# Altium PCB MergeBoard4.PcbDoc
Units mil, origin at the board's own origin, x right, y up, seen from the top; angles counter-clockwise.
Board outline 3165.42 x 3261.12 mil, 4 copper layers (Top Layer, Internal Plane 1, Internal Plane 2, Bottom Layer); 115 components, 67 nets, 383 pads, 110 vias.
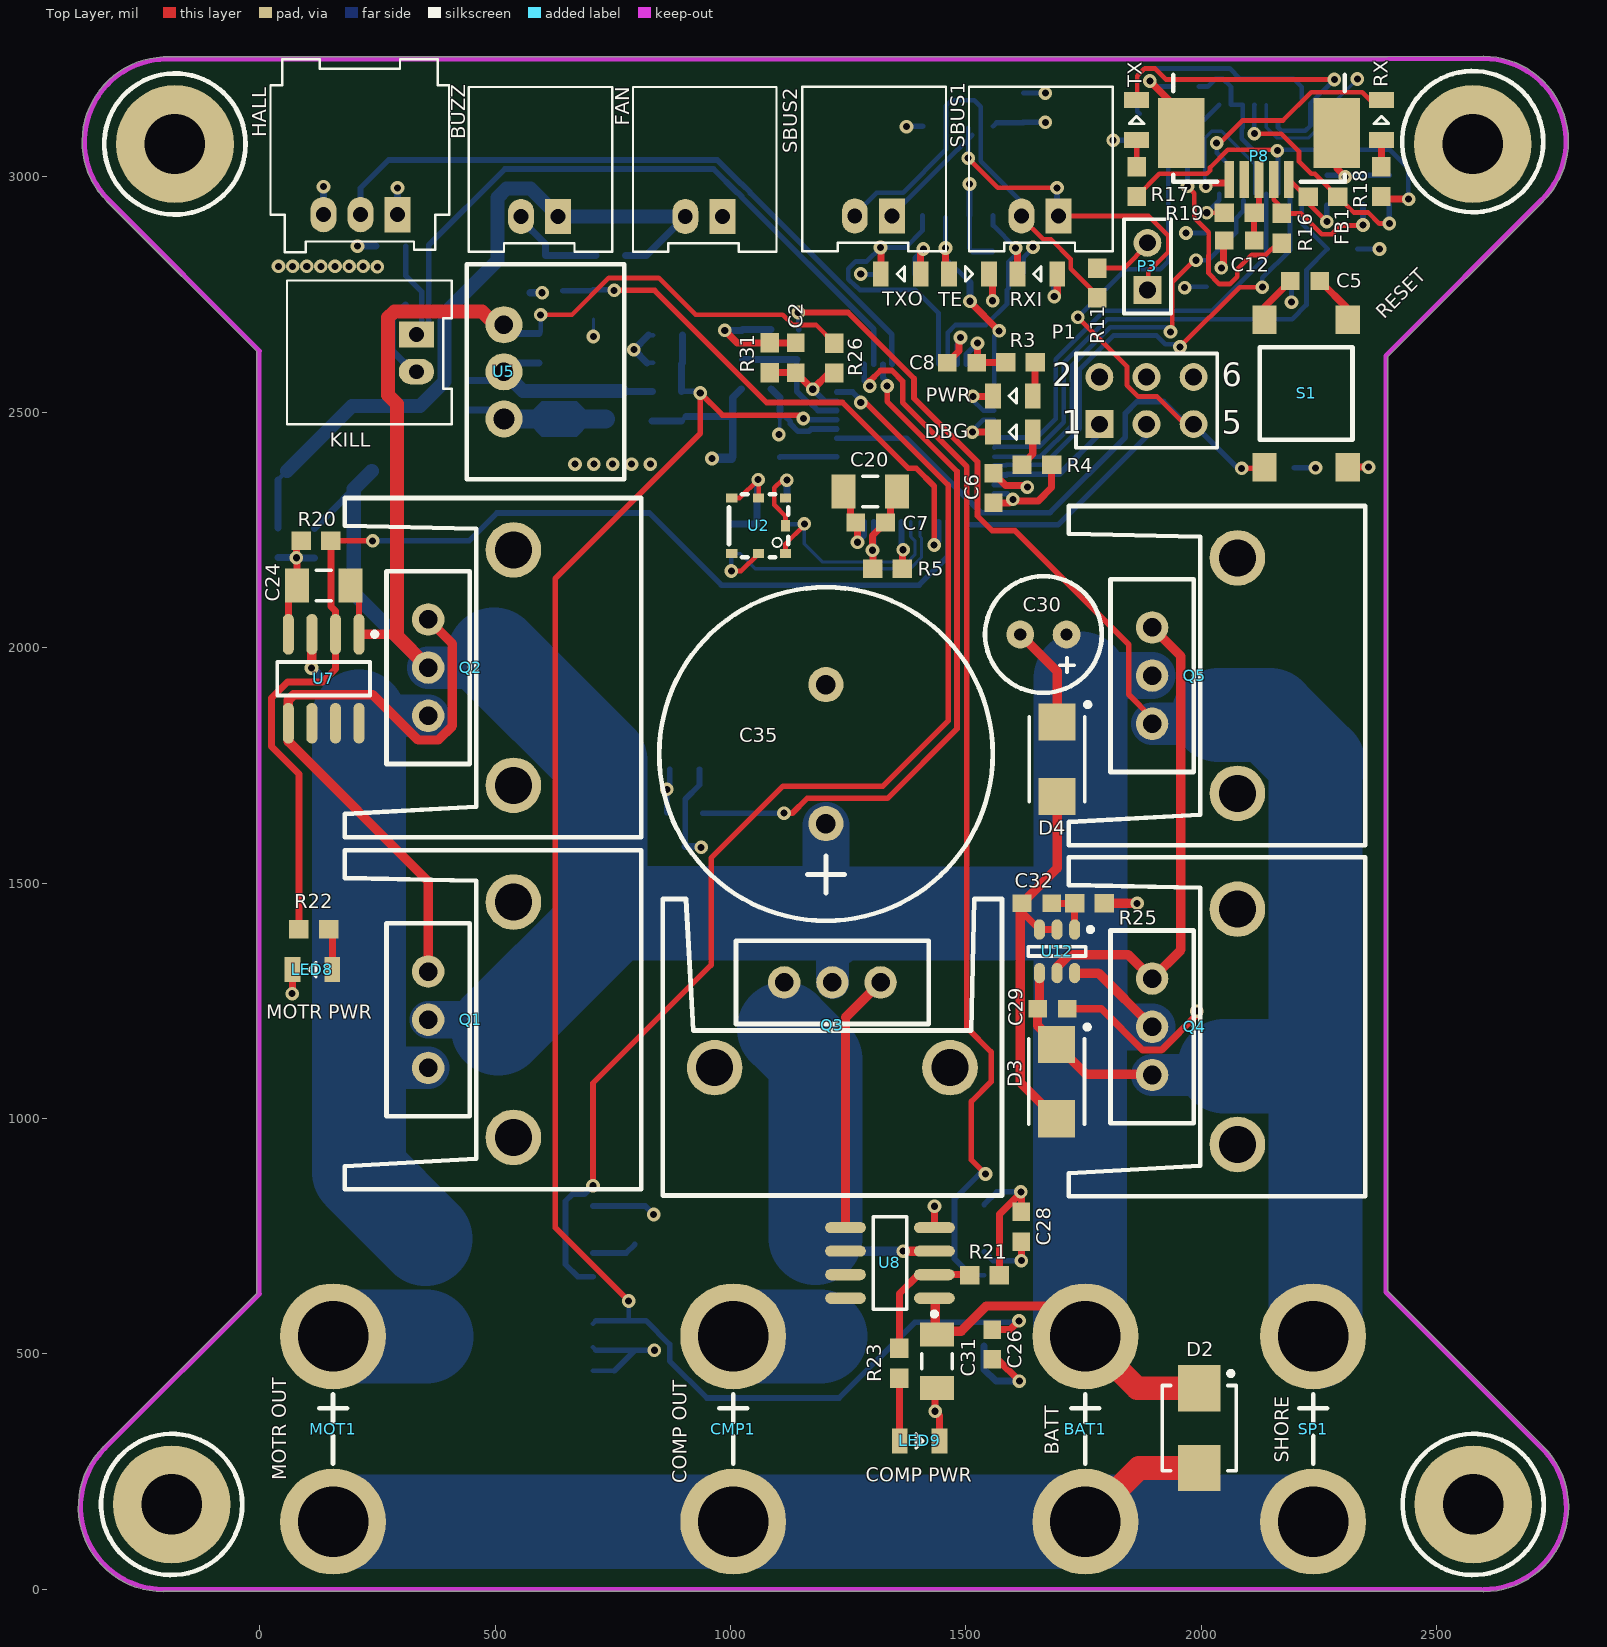
[diagram p0: Top Layer view]
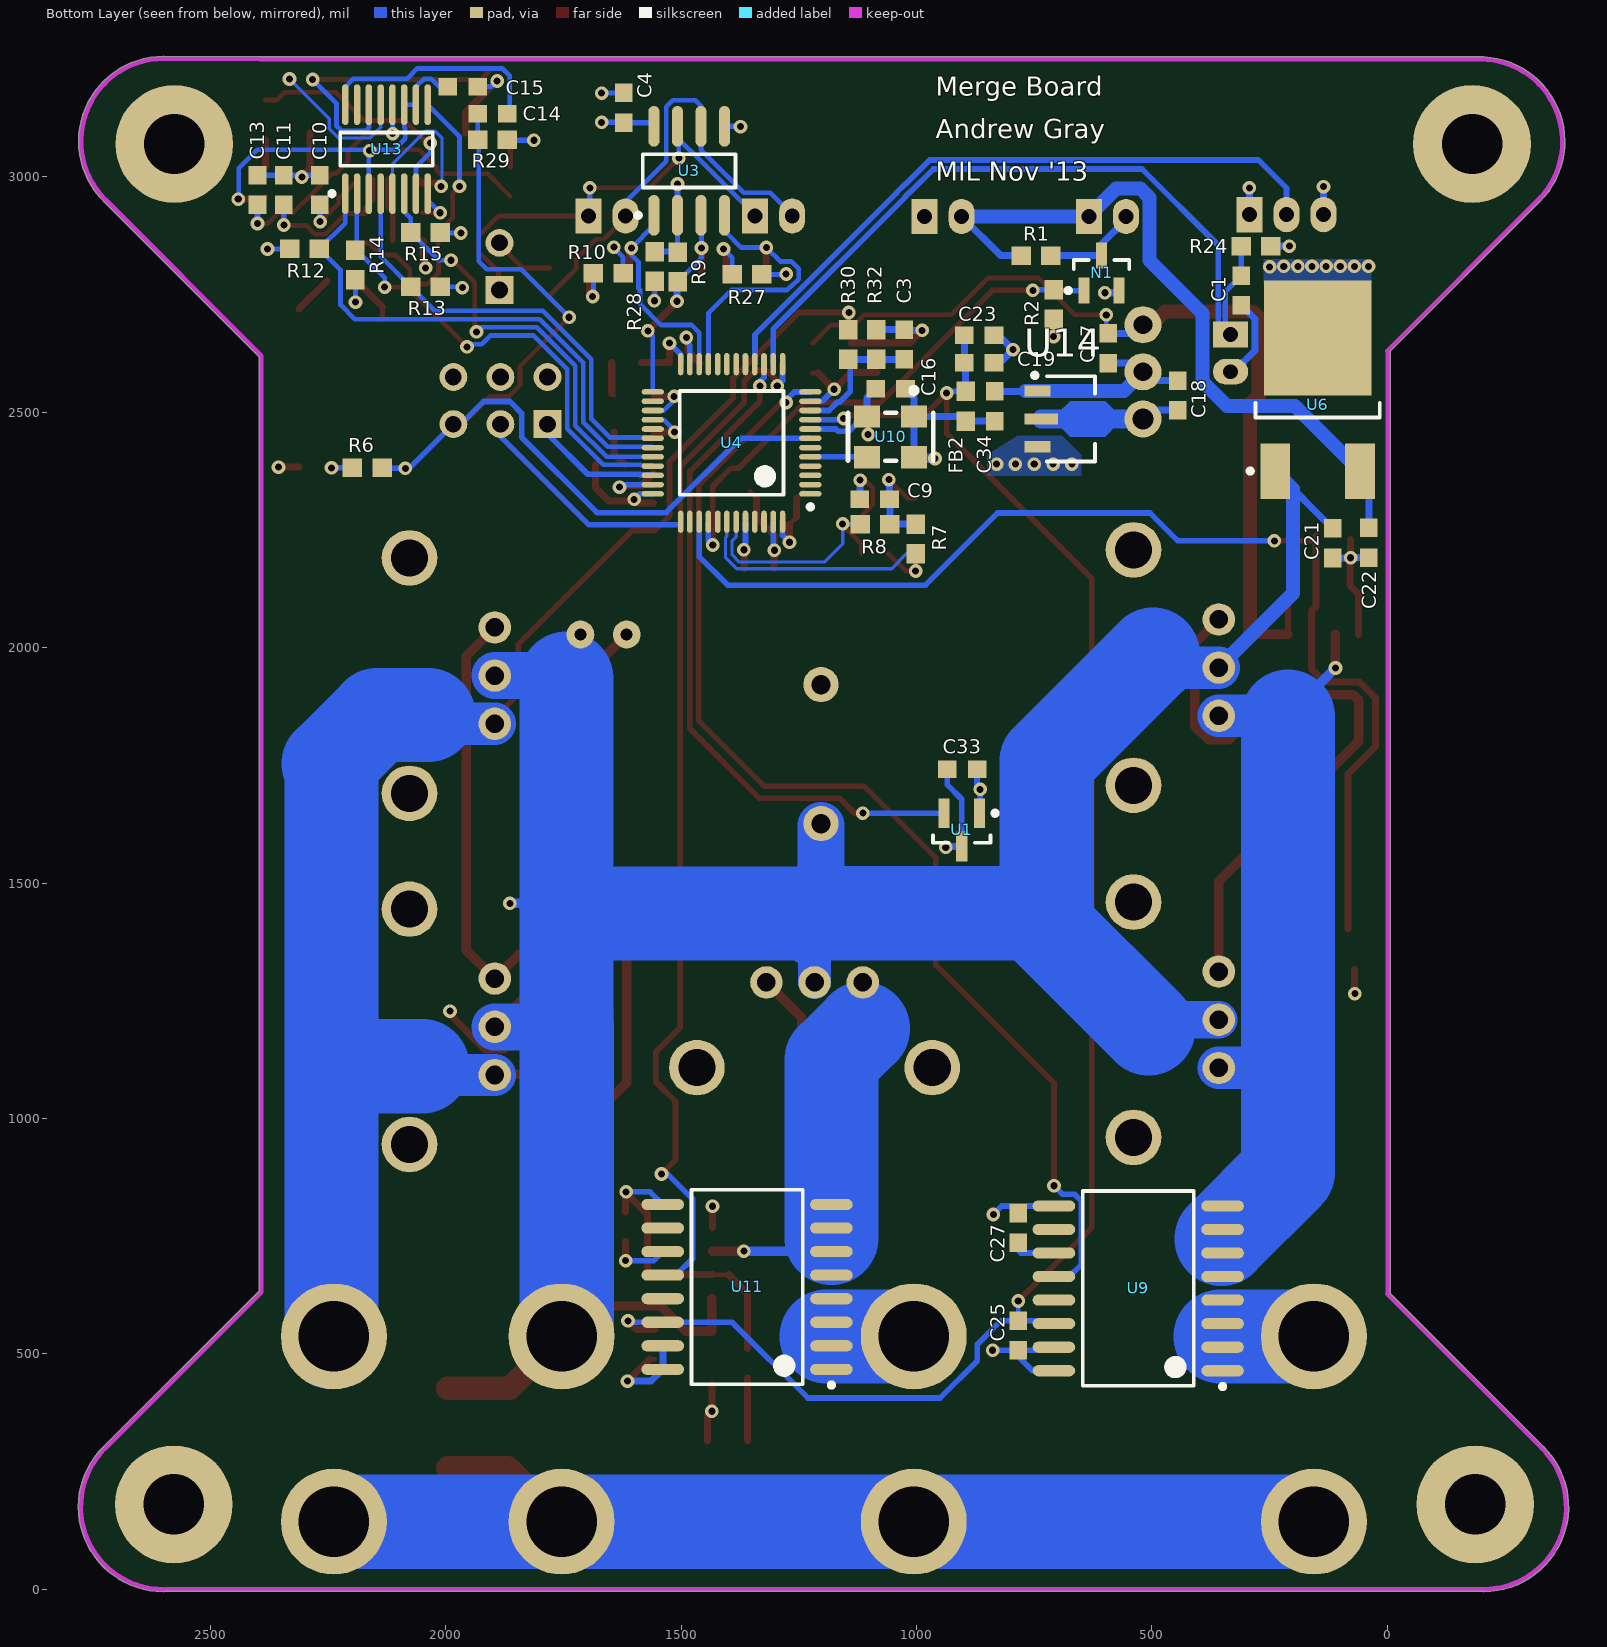
[diagram p1: Bottom Layer view, seen from below]
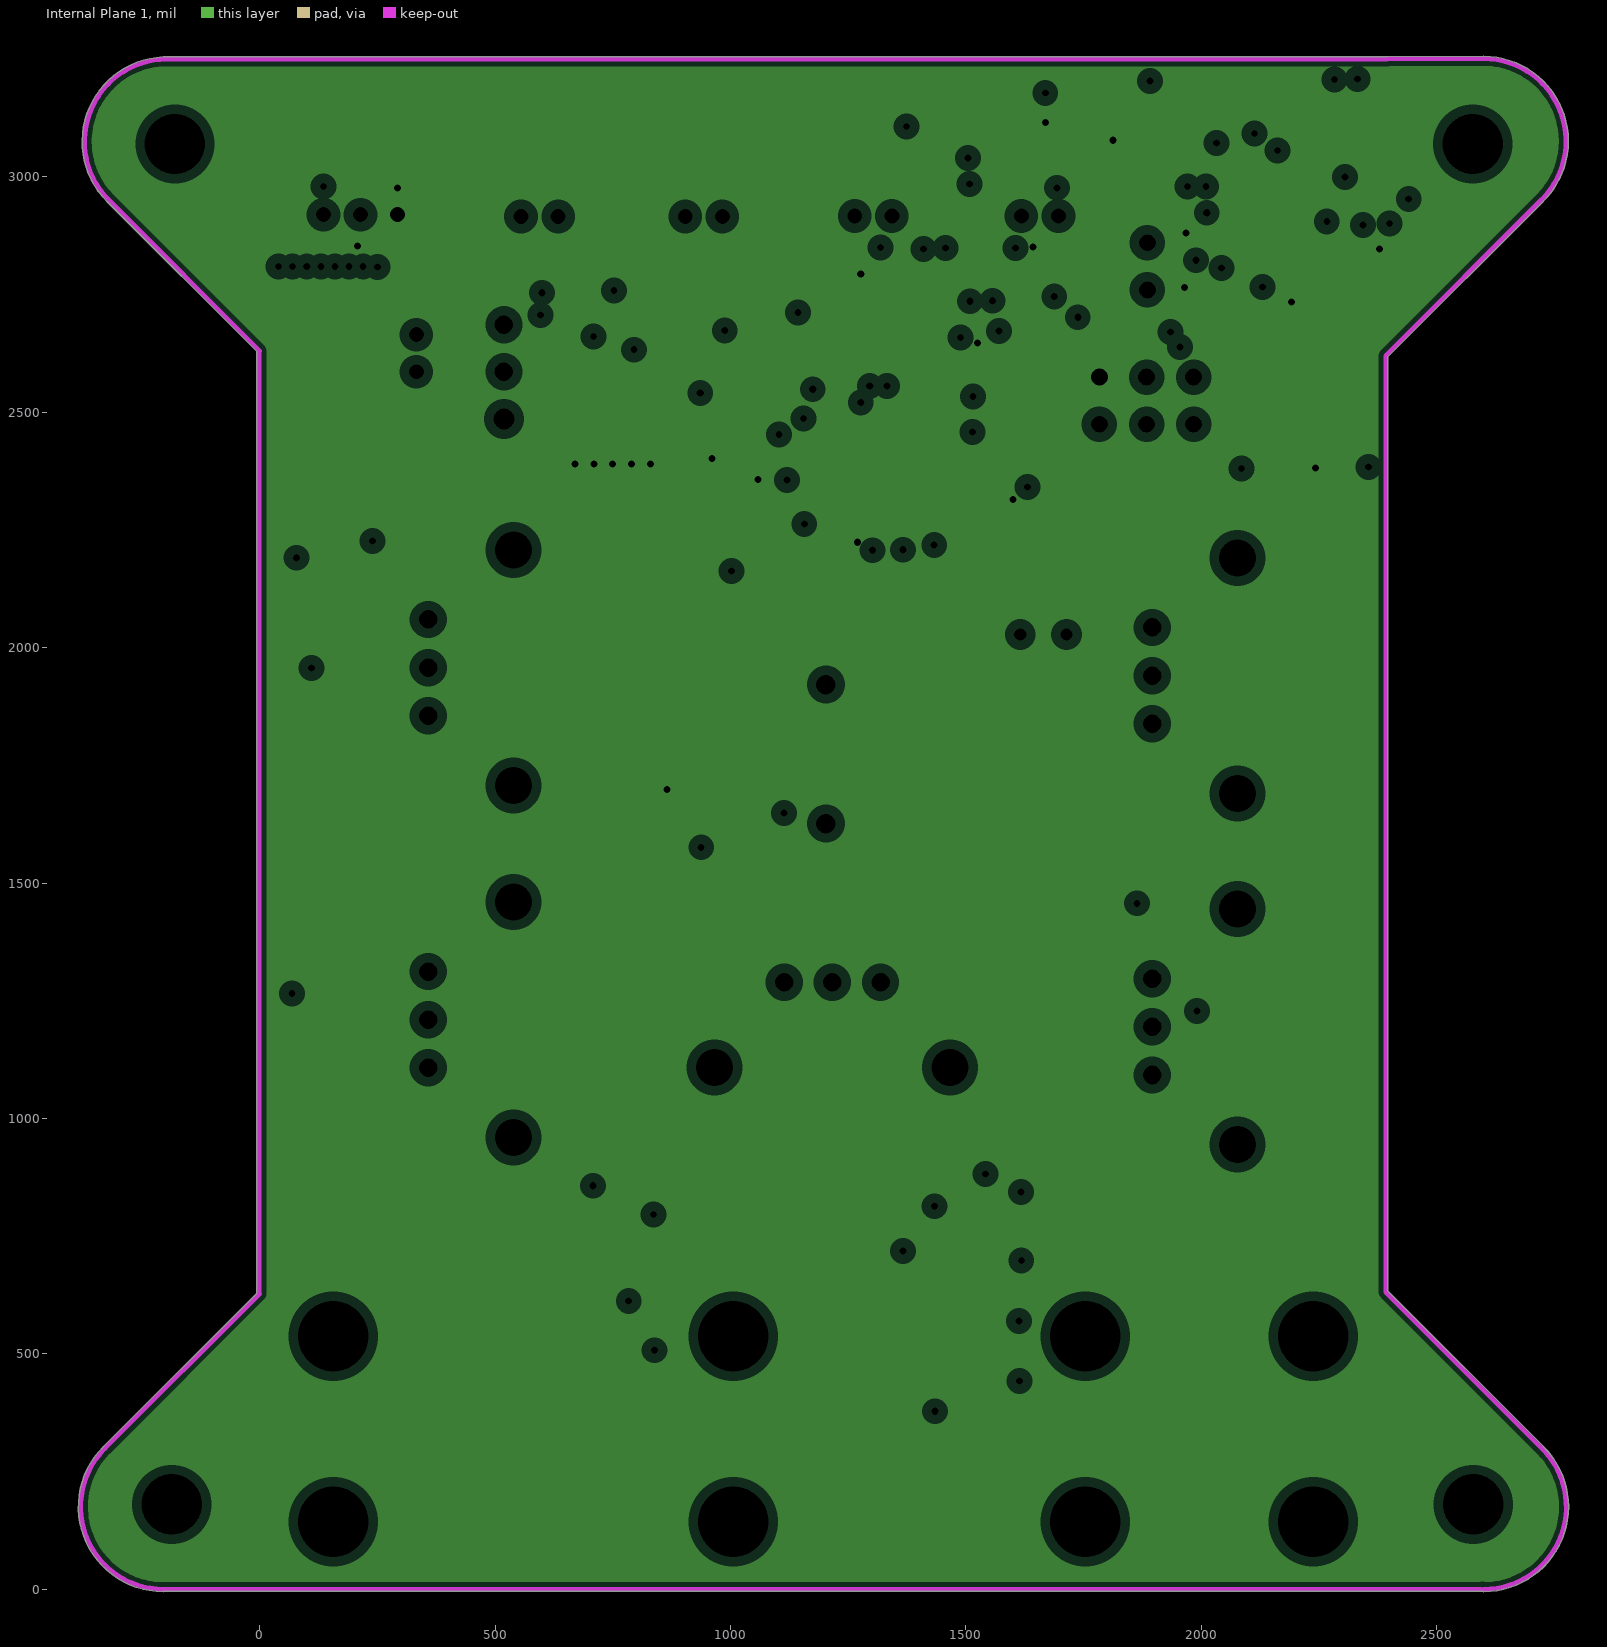
[diagram p2: Internal Plane 1, clearances drawn from the general rule]
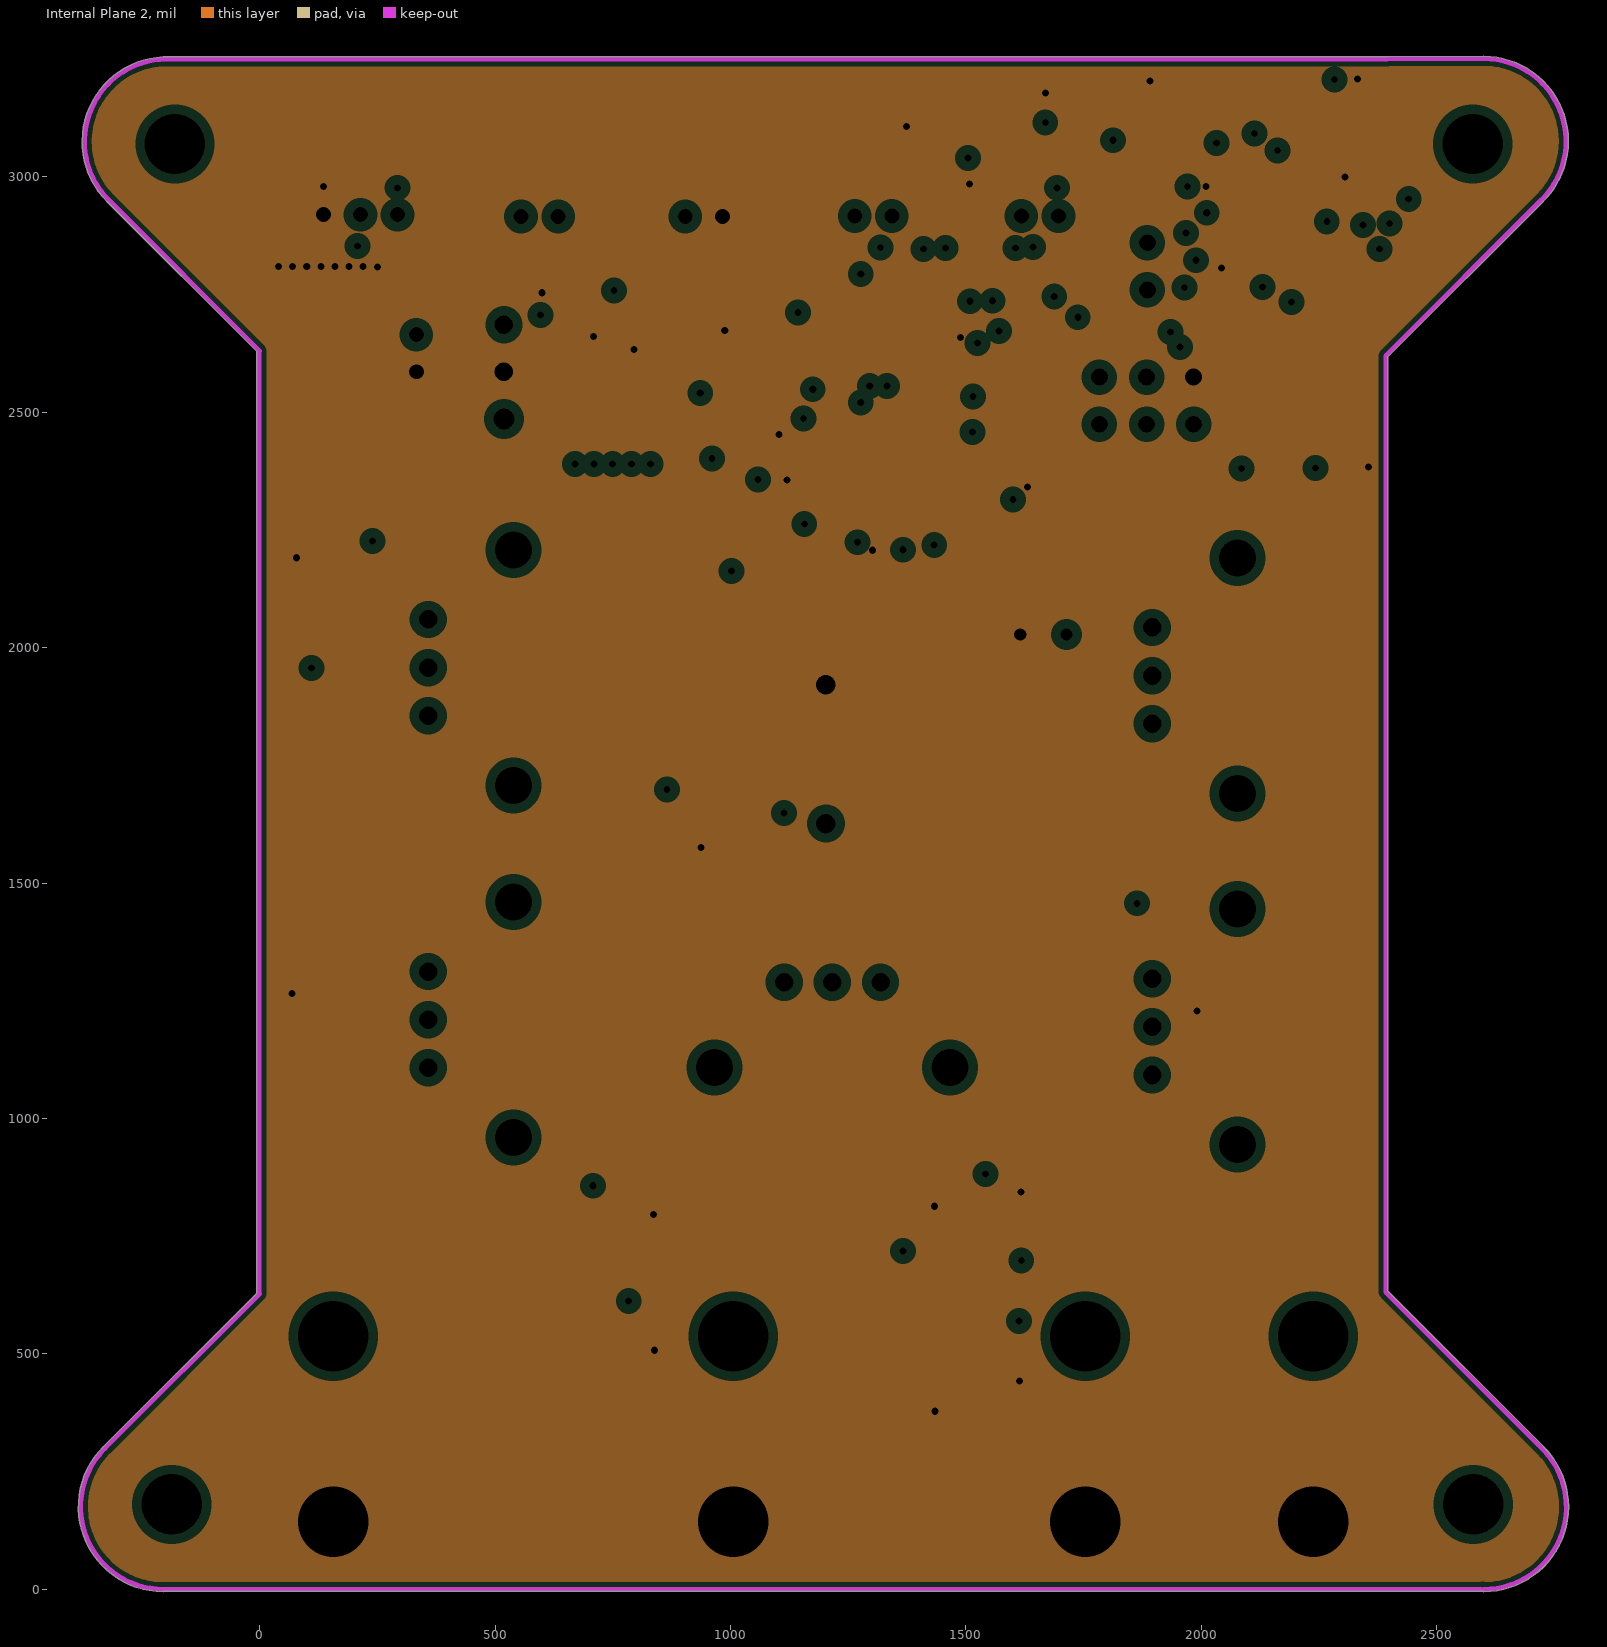
[diagram p3: Internal Plane 2, clearances drawn from the general rule]

## Layer stack, top to bottom
Top Layer: signal copper 1.4
Dielectric: core 12.6, FR-4, Dk 4.8
Internal Plane 1: plane copper 1.4, net 3V3
Dielectric: prepreg 12.6, FR-4, Dk 4.8
Internal Plane 2: plane copper 1.4, net GND
Dielectric: core 12.6, FR-4, Dk 4.8
Bottom Layer: signal copper 1.4

## Board outline
-205,-5.01 ccw(c-205,0) -204.11,-4.94 2595,-4.94 ccw(c2595,0) 2597.59,-4.2 ccw(c2600.46,-0.09) 2600.46,-5.1 ccw(c2600.46,174.91) 2780.47,174.91 ccw(c2600.46,174.91) 2727.75,302.2 ccw(c2724.2,298.66) 2727.07,302.78 2396.87,632.97 2396.87,2618.43 ccw(c2393.74,2622.26) 2397.23,2618.77 2726.61,2948.14 ccw(c2723.74,2952.26) 2727.29,2948.71 ccw(c2600,3076) 2780.01,3076 ccw(c2600,3076) 2600,3256.02 ccw(c2600,3251) 2599.09,3255.93 2395,3254.94 2394.98,3254.94 2395,3254.94 -196.11,3254.94 ccw(c-197,3250) -197,3255.02 ccw(c-197,3075) -202.33,3254.94 -204,3254.94 ccw(c-204,3250) -204.98,3254.84 ccw(c-197,3075) -324.29,2947.71 ccw(c-320.74,2951.26) -323.61,2947.14 -5.92,2629.45 ccw(c-1,2629) -5.94,2629 -5.94,628.53 -331.61,302.86 ccw(c-328.74,298.74) -332.29,302.29 ccw(c-205,175)

## Design rules (kind name [scope] priority, off if disabled: settings)
Clearance [All] p1: gap=7
Height [All] p1: minheight=0 maxheight=1500 prefheight=500
HoleSize [All] p1: absolutevalues=TRUE maxlimit=150 minlimit=15 maxpercent=80.000 minpercent=20.000
PlaneClearance [All] p1: clearance=20
PlaneConnect [All] p1: planeconnectstyle=Direct reliefexpansion=20 reliefentries=4 reliefconductorwidth=10 reliefairgap=10
PolygonConnect [All] p1: connectstyle=Direct reliefconductorwidth=10 reliefentries=4 polygonreliefangle="90 Angle" airgapwidth=10
RoutingVias [All] p1: holewidth=15 width=29 viastyle="Through Hole" minholewidth=15 minwidth=29 maxholewidth=40 maxwidth=100
SilkToSolderMaskClearance SilkscreenOverComponentPads [IsPad] p1: minsilkscreentomaskgap=10 clearancetoexposedcopper=TRUE
SolderMaskExpansion SolderMaskExpansion_1 [All] p1: expansion=4
SolderMaskExpansion "Negative Mask" [All] p2: expansion=-20
Width [All] p1: maxlimit=200 minlimit=7 preferedwidth=10
23 further rules are at their usual default settings.

## Classes and differential pairs
component class Attachments: BUZZ C1 C2 C3 C33 FAN HALL KILL N1 R1 R2 R24 R26 R30 R31 R32 SHPW U1
component class CPU: C4 C5 C6 C7 C8 C9 C10 C11 C12 C13 C14 C15 C16 C20 DBG FB1 P1 P3 P8 PWR R3 R4 R5 R6 R7 R8 R9 R10 R11 R12 R13 R14 R15 R16 R17 R18 R19 R27 R28 R29 RX RXI S1 SBUS1 SBUS2 TE TX TXO U2 U3 U4 U10 U13
component class PowerSplitter: C24 C25 C26 C27 C28 C31 CMP1 LED8 LED9 MOT1 Q1 Q2 Q3 R20 R21 R22 R23 U7 U8 U9 U11
component class Power: C17 C18 C19 C21 C22 C23 C34 FB2 U5 U6 U14
component class "Rail Station": BAT1 C29 C30 C32 C35 D2 D3 D4 Q4 Q5 R25 SP1 U12
net class Blob: MT_PW RAIL+ SHORE+

## Components (designator, comment, footprint, x,y, rotation, side; value= is the part's Value field where it differs from the comment)
BAT1 "BATWIRE" BATWIRE12 1754,537 r270 top
BUZZ "2-pin Horz Sherlock" MOLEX-HDR-1X2-SHERLOCK-HORZ 634,2916 r0 top
C1 "Cap" CAPC0603 310,2759 r270 bottom
C2 "Cap" CAPC0603 1139,2616 r90 top
C3 "Cap" CAPC0603 1026,2644 r90 bottom
C4 "Cap" CAPC0603 1622,3147 r270 bottom
C5 "Cap" CAPC0603 2221,2779 r0 top
C6 "Cap" CAPC0603 1559,2339 r90 top
C7 "Cap" CAPC0603 1298,2266 r0 top
C8 "Cap" CAPC0603 1492,2605 r180 top
C9 "Cap" CAPC0603 1089,2315 r0 bottom
C10 "Cap" CAPC0603 2268,2972 r90 bottom
C11 "Cap" CAPC0603 2344,2972 r90 bottom
C12 "Cap" CAPC0603 2081,2865 r180 top
C13 "Cap" CAPC0603 2400,2972 r90 bottom
C14 "Cap" CAPC0603 1901,3134 r0 bottom
C15 "Cap" CAPC0603 1964,3192 r180 bottom
C16 "Cap" CAPC0603 1055,2550 r0 bottom
C17 "Cap" CAPC0603 593,2636 r270 bottom
C18 "Cap" CAPC0603 445,2536 r90 bottom
C19 "Cap" CAPC0603 867,2605 r180 bottom
C20 "Cap" CAPC1206 1297,2332 r180 top
C21 "Cap" CAPC0603 116,2222 r270 bottom
C22 "Cap" CAPC0603 39,2223 r270 bottom
C23 "Cap" CAPC0603 867,2664 r180 bottom
C24 "Cap" CAPC1206 136,2132 r0 top
C25 "Cap" CAPC0603 784,539 r270 bottom
C26 "Cap" CAPC0603 1556,520 r270 top
C27 "Cap" CAPC0603 784,767 r90 bottom
C28 "Cap" CAPC0603 1618,770 r90 top
C29 "Cap" CAPC0603 1684,1233 r0 top
C30 "CapPol" CAP22uF100V 1665,2028 r180 top
C31 "Cap" CAPC1206 1439,484 r90 top
C32 "Cap" CAPC0603 1651,1457 r180 top
C33 "Cap" CAPC0603 903,1742 r180 bottom
C34 "Cap" CAPC0603 834,2513 r90 bottom
C35 "CapPol" CAP1000uF 1203,1774 r90 top
CMP1 "BATWIRE" BATWIRE12 1006,537 r270 top
D2 "SMBJ60A-13-F" SMBJ60A-13-F 1996,342 r270 top
D3 "SS16T3G" SS16T3G 1693,1078 r270 top
D4 "SS16T3G" SS16T3G 1694,1763 r270 top
DBG "LED" LED0805 1600,2458 r180 top
FAN "2-pin Horz Sherlock" MOLEX-HDR-1X2-SHERLOCK-HORZ 983,2916 r0 top
FB1 "FBead" RES0603 2259,2958 r180 top
FB2 "FBead" RES0603 896,2513 r270 bottom
HALL "3pos RA sherlock connector" MOLEX-HDR-1X3-SHERLOCK-RA 293,2920 r0 top
KILL "2-pin Horz Sherlock" MOLEX-HDR-1X2-SHERLOCK-HORZ 333,2665 r90 top
LED8 "LED" LED0805 112,1316 r180 top
LED9 "LED" LED0805 1402,315 r0 top
MOT1 "BATWIRE" BATWIRE12 156,537 r270 top
N1 "NMOSFET" 2N7002P,215 607,2796 r90 bottom
P1 "Header 3X2" HDR2X3 1784,2475 r0 top
P3 "Header 2" HDR1X2 1886,2760 r90 top
P8 "UX60SC-MB-5ST" UX60SC-MB-5ST 2123,2995 r180 top
PWR "LED" LED0805 1600,2535 r180 top
Q1 "IRFB3306PbF" "TO-220AB Heatsink Vertical" 358,1312 r270 top
Q2 "IRFB3306PbF" "TO-220AB Heatsink Vertical" 358,2060 r270 top
Q3 "IRFB3306PbF" "TO-220AB Heatsink Vertical" 1319,1289 r180 top
Q4 "IRFB3306PbF" "TO-220AB Heatsink Vertical" 1896,1297 r270 top
Q5 "IRFB3306PbF" "TO-220AB Heatsink Vertical" 1896,2043 r270 top
R1 "Res" RES0603 746,2833 r180 bottom
R2 "Res" RES0603 709,2729 r270 bottom
R3 "Res" RES0603 1616,2606 r0 top
R4 "Res" RES0603 1651,2389 r180 top
R5 "Res" RES0603 1334,2168 r180 top
R6 "Res" RES0603 2167,2382 r180 bottom
R7 "Res" RES0603 1002,2231 r270 bottom
R8 "Res" RES0603 1088,2262 r0 bottom
R9 "Res" RES0603 1507,2809 r90 bottom
R10 "Res" RES0603 1655,2795 r0 bottom
R11 "Res" RES0603 1779,2775 r270 top
R12 "Res" RES0603 2300,2847 r180 bottom
R13 "Res" RES0603 2043,2767 r0 bottom
R14 "Res" RES0603 2192,2813 r90 bottom
R15 "Res" RES0603 2043,2882 r0 bottom
R16 "Res" RES0603 2171,2891 r270 top
R17 "Res" RES0603 1863,2990 r90 top
R18 "Res" RES0603 2383,2990 r90 top
R19 "Res" RES0603 2081,2924 r180 top
R20 "Res" RES0603 120,2227 r180 top
R21 "Res" RES0603 1540,667 r0 top
R22 "Res" RES0603 115,1402 r0 top
R23 "Res" RES0603 1359,480 r270 top
R24 "Res" RES0603 279,2853 r0 bottom
R25 "Res" RES0603 1763,1457 r180 top
R26 "Res" RES0603 1221,2615 r270 top
R27 "Res" RES0603 1360,2793 r0 bottom
R28 "Res" RES0603 1556,2810 r90 bottom
R29 "Res" RES0603 1901,3079 r0 bottom
R30 "Res" RES0603 1145,2644 r270 bottom
R31 "Res" RES0603 1084,2616 r90 top
R32 "Res" RES0603 1086,2644 r90 bottom
RX "LED" LED0805 2383,3121 r90 top
RXI "LED" LED0805 1652,2794 r180 top
S1 "Button" PTS645xxxxSMTR92 2223,2540 r270 top
SBUS1 "2-pin Horz Sherlock" MOLEX-HDR-1X2-SHERLOCK-HORZ 1697,2917 r0 top
SBUS2 "2-pin Horz Sherlock" MOLEX-HDR-1X2-SHERLOCK-HORZ 1343,2917 r0 top
SP1 "BATWIRE" BATWIRE12 2238,537 r270 top
TE "LED" LED0805 1507,2794 r0 top
TX "LED" LED0805 1863,3121 r90 top
TXO "LED" LED0805 1362,2794 r180 top
U1 "MCP9701" MCP970X-E/TT 904,1613 r270 bottom
U2 "BMP180" BMP180 1060,2259 r270 top
U3 "ISL83485" ISL8348xIBZ 1483,3013 r90 bottom
U4 "STM32F103C8T7" STM32F103C8T7 1393,2435 r0 bottom
U5 "R-78C5.0-1.0" R-78C5.0-1.0 519,2686 r270 top
U6 "MC78M12CDTG" MC78M12CDTG 148,2548 r90 bottom
U7 "MIC5011" MIC5011 136,1934 r270 top
U8 "MIC5011" MIC5011 1339,693 r180 top
U9 "ACS710" ACS710 529,639 r0 bottom
U10 "636L3C008M" 636L3C 1055,2448 r0 bottom
U11 "ACS710" ACS710 1360,642 r0 bottom
U12 "LM5050-1" LM5050 1694,1355 r270 top
U13 "FT230XS" FT230XS 2126,3059 r90 bottom
U14 "MCP1703AT" MCP1703AT-xx02EMB 672,2486 r180 bottom

## Footprints (in the part's own frame and the unit in brackets; to place one, negate y for a bottom-side part, rotate by r counter-clockwise, add the part's x,y. Pads: shape width x height; smd on the part's side, far side on the other; paste and mask are expansions set on the pad)
2N7002P,215 [mm] "MOSFET N-CH SGL 60V SOT-23"
  rect 1.4x0.6 smd: 1(-0.95,0.95) 2(-0.95,-0.95) 3(0.95,0)
  silkscreen extent -1.07,-1.5 0.7,1.93, body extent -0.7,-1.5 0.7,1.5, height 1.1
636L3C [mm]
  rect 1.4x1.2 smd: 1(-1.27,-1.1) 2(1.27,-1.1) 3(1.27,1.1) 4(-1.27,1.1)
  silkscreen extent -2.3,-2.65 2.3,1.3, body extent -2.5,-1.6 2.5,1.6, height 2
ACS710 [mm] "SOIC, 16-Leads, Body 10.5x7.6mm (max), Pitch 1.27mm, IPC Medium Density"
  oval 2.3x0.6 smd: 1(-4.55,4.445) 2(-4.55,3.175) 3(-4.55,1.905) 4(-4.55,0.635) 5(-4.55,-0.635) 6(-4.55,-1.905) 7(-4.55,-3.175) 8(-4.55,-4.445) 9(4.55,-4.445) 10(4.55,-3.175) 11(4.55,-1.905) 12(4.55,-0.635) 13(4.55,0.635) 14(4.55,1.905) 15(4.55,3.175) 16(4.55,4.445)
  silkscreen extent -4.67,-5.25 3,5.42, body extent -3.8,-5.25 3.8,5.25, height 2.65
BATWIRE12 [mm] "Two 12AWG wires soldered directly to the board"
  round 5.715 hole 3.81: +(0,0) -(10,0)
  silkscreen extent 3.13,-0.75 6.87,0.75
BMP180 [mm]
  rect 0.5x0.6 smd: 1(-1.5,1.45) 2(-1.5,0) 3(-1.5,-1.45) 4(1.5,-1.45) 5(1.5,0) 6(1.5,1.45)
  rect 0.6x0.5 smd: 7(0,1.45)
  silkscreen extent -1.7,-1.6 1.7,1.6, body extent -1.9,-1.8 1.9,1.8, height 2
CAP22uF100V [mm] "CAP ALUM 22UF 100V 20% RADIAL"
  round 1.5 hole 0.65: 1(-1.25,0) 2(1.25,0)
  silkscreen extent -3.15,-3.15 3.15,3.15, body extent -3.12,-3.14 3.15,3.14, height 11.2
CAP1000uF [mm] "CAP ALUM 1000UF 50V 20% RADIAL"
  round 1.9 hole 1.05: 1(-3.75,0) 2(3.75,0)
  silkscreen extent -9,-9 9,9, body extent -8.93,-8.98 9,8.98, height 20
CAPC0603 [mm] "Chip Capacitor, 2-Leads, Body 1.60x0.80mm, IPC Medium Density"
  rect 1x0.95 smd: 1(-0.8,0) 2(0.8,0)
  body extent -0.88,-0.48 0.87,0.48, height 0.8
CAPC1206 [mm] "Chip Capacitor, 2-Leads, Body 3.20x1.60mm, IPC Medium Density"
  rect 1.3x1.85 smd: 1(-1.45,0) 2(1.45,0)
  silkscreen extent -0.4,-0.82 0.4,0.82, body extent -1.7,-0.9 1.7,0.9, height 1.8
FT230XS [mm] "SOP, 16-Leads, Body 4.90x3.90mm, Pitch 0.64mm, IPC Medium Density"
  oval 2.2x0.35 smd: 1(-2.4,2.222) 2(-2.4,1.588) 3(-2.4,0.953) 4(-2.4,0.318) 5(-2.4,-0.317) 6(-2.4,-0.952) 7(-2.4,-1.587) 8(-2.4,-2.222) 9(2.4,-2.222) 10(2.4,-1.588) 11(2.4,-0.953) 12(2.4,-0.318) 13(2.4,0.317) 14(2.4,0.952) 15(2.4,1.587) 16(2.4,2.222)
  silkscreen extent -2.52,-2.5 0.9,3.07, body extent -2,-2.5 2,2.5, height 1.76
HDR1X2 [mm] "Connector; Header; 2 Position"
  rect 1.5x1.5 hole 0.9: 1(0,0)
  round 1.5 hole 0.9: 2(2.54,0)
  silkscreen extent -1.27,-1.27 3.81,1.27
HDR2X3 [mm] "Connector; Header; 3x2 Position"
  rect 1.5x1.5 hole 0.9: 1(0,0)
  round 1.5 hole 0.9: 2(0,2.54) 3(2.54,0) 4(2.54,2.54) 5(5.08,0) 6(5.08,2.54)
  silkscreen extent -1.27,-1.27 6.35,3.81
ISL8348xIBZ [mm] "SOIC, 8-Leads, Body 4.90x3.90mm, Pitch 1.27mm, IPC Medium Density"
  oval 2.2x0.6 smd: 1(-2.4,1.905) 2(-2.4,0.635) 3(-2.4,-0.635) 4(-2.4,-1.905) 5(2.4,-1.905) 6(2.4,-0.635) 7(2.4,0.635) 8(2.4,1.905)
  silkscreen extent -2.52,-2.5 0.9,2.88, body extent -2,-2.5 2,2.5, height 1.75
LED0805 [mm] "Chip LED, 2-Leads, Body 2.00x1.25mm, IPC Medium Density"
  rect 0.85x1.35 smd: A(-1.075,0) C(1.075,0)
  silkscreen extent -0.2,-0.4 0.2,0.4, body extent -1,-0.63 1,0.63, height 0.75
LM5050 [mm] "SOT23, 6-Leads, Body 2.90x2.80mm, Pitch 0.95mm, IPC Medium Density"
  oval 1.1x0.6 smd: 1(-1.175,0.95) 2(-1.175,0) 3(-1.175,-0.95) 4(1.175,-0.95) 5(1.175,0) 6(1.175,0.95)
  silkscreen extent -1.3,-1.55 0.25,1.93, body extent -0.87,-1.52 0.88,1.53, height 1.1
MC78M12CDTG [mm] "IC REG LDO 12V 0.5A DPAK"
  rect 3x1.6 smd: 1(-4.39,2.29) 3(-4.39,-2.29)
  rect 6.2x5.8 smd: 2(2.79,0)
  silkscreen extent -4.51,-3.35 -0.71,3.77, body extent -1.5,-3.37 4.72,3.37, height 2.38
MCP970X-E/TT [mm] "SOT23, 3-Leads, Body 2.86x2.37mm, Pitch 0.95mm, IPC Medium Density"
  rect 1.6x0.6 smd: 1(-0.9,0.95) 2(-0.9,-0.95) 3(0.9,0)
  silkscreen extent -1.02,-1.55 0.7,1.92, body extent -0.7,-1.52 0.7,1.53, height 1.12
MCP1703AT-xx02EMB [mm] "SOT89, 3-Leads, Body 4.49x2.45mm, Pitch 1.50mm, Lead Span 4.1mm, IPC Medium Density"
  rect 1.4x0.6 smd: 1(-1.8,1.5) 3(-1.8,-1.5)
  rect 1.8x0.6 smd: 2(-1.6,0)
  Top Layer region: -0.7,0.3 -0.05,0.95 1.85,0.95 2.5,0.3 2.5,-0.3 1.85,-0.95 -0.05,-0.95 -0.7,-0.3
  silkscreen extent -2.08,-2.3 1.3,2.47, body extent -1.3,-2.3 1.3,2.3, height 1.6
MIC5011 [mm] "SOIC, 8-Leads, Body 4.90x3.90mm, Pitch 1.27mm, IPC Medium Density"
  oval 2.2x0.6 smd: 1(-2.4,1.905) 2(-2.4,0.635) 3(-2.4,-0.635) 4(-2.4,-1.905) 5(2.4,-1.905) 6(2.4,-0.635) 7(2.4,0.635) 8(2.4,1.905)
  silkscreen extent -2.52,-2.5 0.9,2.88, body extent -2,-2.5 2,2.5, height 1.63
MOLEX-HDR-1X2-SHERLOCK-HORZ [mm]
  rect 1.397x1.905 hole 0.8: 1(0,0)
  oval 1.397x1.905 hole 0.8: 2(-2,0)
  silkscreen extent -4.83,-1.91 2.92,6.98, body extent -4.83,-1.91 2.87,8.59, height 5.54
MOLEX-HDR-1X3-SHERLOCK-RA [mm]
  rect 1.397x1.905 hole 0.8: 1(0,0)
  oval 1.397x1.905 hole 0.8: 2(-2,0) 3(-4,0)
  silkscreen extent -6.86,-2.03 2.79,8.38, body extent -6.88,-1.99 2.82,8.51, height 5.75
PTS645xxxxSMTR92 [mm] "PTS645 Series SMT 6 mm Tactile Switch"
  rect 1.555x1.3 smd: A(-3.975,2.25) A(3.975,2.25) B(-3.975,-2.25) B(3.975,-2.25)
  silkscreen extent -2.5,-2.5 2.5,2.5, body extent -3,-3 3,3, height 4.5
R-78C5.0-1.0 [mm] "CONV DC/DC 1A 5V OUT SIP VERT"
  round 2 hole 1: 1(0,0) 2(2.54,0)
  round 2 hole 1.15: 3(5.08,0)
  silkscreen extent -3.26,-2 8.34,6.5, body extent -3.2,-1.9 8.3,6.5, height 10.8
RES0603 [mm] "Chip Resistor, 2-Leads, Body 1.60x0.80mm, IPC Medium Density"
  rect 1.05x1 smd: 1(-0.8,0) 2(0.8,0)
  body extent -0.88,-0.48 0.87,0.47, height 0.8
SMBJ60A-13-F [mm] "TVS UNIDIRECT 600W 60V SMB"
  rect 2.5x2.3 smd: A(2.15,0) C(-2.15,0)
  silkscreen extent -3.07,-2 2.3,2, body extent -2.29,-1.97 2.28,1.97, height 2.62
SS16T3G [mm] "DIODE SCHOTTKY 60V 1A SMA"
  rect 2x2 smd: A(2,0) C(-2,0)
  silkscreen extent -3.07,-1.5 2.3,1.78, body extent -2.29,-1.46 2.28,1.46, height 2.2
STM32F103C8T7 [mm] "MCU ARM 32BIT 64K FLASH 48-LQFP"
  oval 1.2x0.3 smd mask+0.07: 1(-4.25,2.75) 2(-4.25,2.25) 3(-4.25,1.75) 4(-4.25,1.25) 5(-4.25,0.75) 6(-4.25,0.25) 7(-4.25,-0.25) 8(-4.25,-0.75) 9(-4.25,-1.25) 10(-4.25,-1.75) 11(-4.25,-2.25) 12(-4.25,-2.75) 25(4.25,-2.75) 26(4.25,-2.25) 27(4.25,-1.75) 28(4.25,-1.25) 29(4.25,-0.75) 30(4.25,-0.25) 31(4.25,0.25) 32(4.25,0.75) 33(4.25,1.25) 34(4.25,1.75) 35(4.25,2.25) 36(4.25,2.75)
  oval 0.3x1.2 smd mask+0.07: 13(-2.75,-4.25) 14(-2.25,-4.25) 15(-1.75,-4.25) 16(-1.25,-4.25) 17(-0.75,-4.25) 18(-0.25,-4.25) 19(0.25,-4.25) 20(0.75,-4.25) 21(1.25,-4.25) 22(1.75,-4.25) 23(2.25,-4.25) 24(2.75,-4.25) 37(2.75,4.25) 38(2.25,4.25) 39(1.75,4.25) 40(1.25,4.25) 41(0.75,4.25) 42(0.25,4.25) 43(-0.25,4.25) 44(-0.75,4.25) 45(-1.25,4.25) 46(-1.75,4.25) 47(-2.25,4.25) 48(-2.75,4.25)
  silkscreen extent -4.37,-2.8 2.8,3.57, body extent -3.5,-3.5 3.5,3.5, height 1.6
"TO-220AB Heatsink Vertical" [mm] "Vertical Heatsink for better heat management"
  round 3 hole 2: 0(-3.75,4.6) 0(8.95,4.6)
  round 1.75 hole 1: D(2.6,0) G(0,0) S(5.2,0)
  silkscreen extent -6.55,-4.5 11.75,11.5, body extent -6.48,-4.45 11.81,11.56, height 30.5
UX60SC-MB-5ST [mm] "USB Mini-B Recepticle"
  rect 0.5x2 smd: 1(-1.6,0) 2(-0.8,0) 3(0,0) 4(0.8,0) 5(1.6,0)
  rect 2.5x3.8 smd: SHD(-4.2,-2.5) SHD(4.2,-2.5)
  silkscreen extent -4.62,-5.63 4.62,0.13, body extent -4.9,-6.61 4.9,0.39, height 3.95

## Part data
BAT1 CMP1 MOT1 SP1: "Two large gauge leads soldered directly to the board."
BUZZ FAN KILL SBUS1 SBUS2: library part MOLEX-HDR-1x2-SHERLOCK_RA, "Header, Molex, 2mm Pitch Sherlock Header, Single Row, Horizontal, 2 Circuits, Length 3.3mm,  0353630260"
D2: "TVS UNIDIRECT 600W 60V SMB"
D3 D4: "DIODE SCHOTTKY 60V 1A SMA"
FB1 FB2: "Ferrite Bead"
HALL: library part MOLEX-HDR-1x3-SHERLOCK_RA, "Header, Molex, 2mm Pitch Sherlock Header, Single Row, Right Angle 3 Circuits, Length 3.3mm"
N1: "NMOSFET Template"
P1: "Header, 3-Pin, Dual row"
P3: "Header, 2-Pin"
P8: "USB Mini B Metal Shield SMT"
Q1 Q2 Q3 Q4 Q5: library part IRFx3306PbF, "HEXFET Power MOSFET"
S1: "SPST Button"
U1: library part MCP970x, "Low-Power Linear Active Thermistor ICs"
U2: "Digital Pressure Sensor"
U3: "3.3V RS485 Transceiver"
U4: "MCU ARM 32BIT 64K FLASH 48-LQFP"
U5: "CONV DC/DC 1A 5V OUT SIP VERT"
U6: "IC REG LDO 12V 0.5A DPAK"
U7 U8: "Minimum Parts High- or Low-Side MOSFET Driver"
U9 U11: "Current Sensor with Integrated Overcurrent Detection"
U10: library part 636L3C, "HCMOS/TTL Clock Oscillator"
U12: library part LM5050, "High-Side OR-ing FET Controller"
U13: "USB To Basic UART IC"
U14: "250 mA, 16V, Low Quiescent Current LDO Regulator"

## Free pads (board coordinates)
  round 250 hole 128.5 mask-25: 1(-187,180) 1(-180,3070) 1(2577,3070) 1(2578,180)

## Via types
v1: diameter 29, hole 15, Top Layer to Bottom Layer, tented both sides, 110 vias

## Nets (pads, with @x,y where several pads share a name; then routed paths per layer and width w, separated by ;. In a path a pad name is that pad's centre, name@x,y a point inside that pad or via, vN(x,y) a via of type N, cw(c..) or ccw(c..) an arc to the next point about the centre after c; other vN are vias at no path point)
3V3: C4.2 C6.1 C7.1 C8.1 C9.1 C16.1 C20.2 C33.2 C34.1 FB2.2 HALL.1 P1.2 R3.1 R4.1 R6.1 R7.1 R8.1 R10.1 R12.1 R13.1 R14.1 R15.1 R24.1 R27.1 R29.1 U1.1 U2.2 U2.3 U3.8 U4.24 U4.36 U4.48 U10.1 U10.4 U14.3 | length 1883.6
  Top Layer w7: C7.1 C7.1@1270,2262.5 ; C8.1 1524.5,2606 C8.1@1525,2606.5
  Top Layer w10: U2.3 1020.06,2318.06 v1(1059,2357) ; U2.2 v1@1060,2356 ; C20.2 C20.2@1255,2316.91 ; C7.1@1255,2277.5 C7.1
  Top Layer w15: C7.1@1255,2277.5 C20.2@1255,2316.91 ; v1(1270,2224) C7.1@1270,2262.5 ; C8.1@1524.5,2606 R3.1 ; C8.1@1525,2606.5 v1(1525,2647) ; C6.1 v1@1592.5,2307.5 ; v1(1600,2315) 1603,2312 1654,2312 1682.5,2340.5 R4.1
  Bottom Layer w7: U1.1@865,1650.03 U1.1 ; v1(865,1699) v1@871.5,1705.5
  Bottom Layer w10: FB2.2 FB2.2@905.8,2491.31 ; R8.1@1056.01,2262.5 R8.1 ; v1@1057.5,2355.5 v1(1059,2357) ; v1@1278,2793 R27.1 ; U3.8 U3.8@1566.02,3115.5 ; C4.2 C4.2@1622.5,3116 ; R10.1 1623.5,2829.03 v1@1643,2848.52 ; R29.1@1868.5,3078 R29.1 ; v1@1967,2767 R13.1 ; v1(1968,2881) R15.1@2010.5,2881 ; v1@2192,2735 R14.1 ; R12.1 v1@2378,2847
  Bottom Layer w12: U1.1@865,1650.03 v1(865,1699) ; v1@871.5,1705.5 C33.2 ; v1(1270,2224) 1284.73,2238.73 U4.48 ; U4.24 1501.27,2623.27 v1(1525,2647) ; U4.36 1588.27,2326.73 v1(1600,2315) ; U3.8@1566.02,3115.5 C4.2 ; C4.2@1622.5,3116 v1(1669,3116) ; v1(1813,3078) R29.1@1868.5,3078 ; R6.1 v1(2243,2382)
  Bottom Layer w15: v1(208,2853) R24.1 ; HALL.1 v1(293,2977) ; C34.1 FB2.2 ; FB2.2@905.8,2491.31 U10.1 ; R7.1 R8.1@1056.01,2262.5 ; U10.4@1002.31,2402 U10.4 U10.1 ; C16.1 1005,2531.5 U10.1 ; R8.1 C9.1@1056.5,2314 ; C9.1 v1@1057.5,2355.5
  Bottom Layer w20: v1(961,2402) U10.4@1002.31,2402
  other v1: 670,2390 710,2390 750,2390 790,2390 830,2390 2192,2734 1965,2765 1277,2794 2379,2847 1643,2851
5V: C18.1 U5.3 U14.2 | length 325
  Top Layer w10: U5.3 U5.3@519,2513.35
  Bottom Layer w10: U5.3@500.5,2504.5 U5.3
  Bottom Layer w15: C18.1 U5.3@500.5,2504.5
  Bottom Layer w40: U5.3 U14.2
12V: BUZZ.1 C22.1 FAN.2 R1.1 U6.3 | length 1572.7
  Bottom Layer w10: U6.3@39,2356.32 U6.3
  Bottom Layer w15: C22.1 U6.3@39,2356.32 ; R1.1 821.26,2833 FAN.2
  Bottom Layer w30: U6.3 196.47,2513.8 340.54,2513.8 392.5,2565.76 392.5,2709.82 505,2822.32 505,2955.82 524.68,2975.5 575.76,2975.5 634,2917.26 BUZZ.1 FAN.2
A3V3: C19.1 C23.1 C25.1 C26.1 FB2.1 U4.9 U9.14 U11.14 | length 3782.3
  Top Layer w12: v1(784,612) 628,768 628,2147 936,2455 v1(936,2541) 983,2494 1157,2494 1155,2492 v1(1155,2487)
  Top Layer w15: C26.1 1594.5,551.5 v1(1613,570)
  Bottom Layer w10: U9.14 U9.14@714.63,570.5 ; C25.1 v1(784,612) ; C19.1@896,2602.5 C19.1 ; v1@932.5,2544.5 v1(936,2541)
  Bottom Layer w12: U9.14@714.63,570.5 C25.1 820.5,570.5 871,520 871,485 950,406 1231,406 1392,567 U11.14 1610,567 v1(1613,570) ; FB2.1 v1@932.5,2544.5 ; v1(1155,2487) 1155,2492 1157,2494 1166.79,2484.21 U4.9
  Bottom Layer w15: FB2.1 C19.1@896,2602.5 ; C19.1 C23.1
BOOT0: R5.1 U4.44 | length 99.6
  Top Layer w15: R5.1 v1@1365.5,2206.5
  Bottom Layer w12: U4.44 1363.47,2211.53 v1(1367,2208)
BUZZER: N1.1 R2.1 U4.40 | length 1136
  Top Layer w12: v1(753,2759) 839,2759 1077,2521 1238.11,2521 1377.69,2381.42 1394.58,2381.42 1433,2343 v1(1433,2218)
  Bottom Layer w7: v1(1433,2218) v1@1442.21,2227.21
  Bottom Layer w12: N1.1 R2.1@707.1,2758.6 ; R2.1 v1@751.5,2760.5 ; v1@1442.21,2227.21 U4.40
CLK8MHZ: U4.5 U10.3 | length 121
  Bottom Layer w12: U10.3 1105.78,2405.47 U4.5
CM_PW: Q3.S U8.3 U11.5 U11.6 U11.7 U11.8 | length 725.6
  Top Layer w20: v1(1367,718) U8.3
  Bottom Layer w10: U11.6 U11.6@1181.87,718
  Bottom Layer w20: U11.6@1181.87,718 v1(1367,718)
  Bottom Layer w200: 1114.28,1190.54 1180.09,1124.73 1180.87,1124.73 U11.8 1180.87,746
CMP_EN: R21.1 R23.1 U8.2 | length 281.6
  Top Layer w10: U8.2@1399,668 U8.2
  Top Layer w15: R23.1 1359,628 U8.2@1399,668 ; U8.2 R21.1@1507.5,668
CMP_I: U4.13 U11.12 | length 2234.3
  Top Layer w12: v1@1296,2566 1319,2589 1343,2589 1366,2566 1366,2521 1502,2385 1502,1193 1554,1141 1554,1078 1512,1036 1512,912 v1(1542,882)
  Top Layer w15: v1(1296,2556) v1@1296,2566
  Bottom Layer w10: U11.12@1511,667 U11.12 ; v1@1529,882 v1(1542,882)
  Bottom Layer w12: U4.13 1284.73,2567.27 v1(1296,2556) ; U11.12@1511,667 1476,702 1476,829 v1@1529,882
COMP: CMP1.+ U11.1 U11.2 U11.3 U11.4 | length 185
  Bottom Layer w200: CMP1.+ 1191,537
DEBUG_CTS: R15.2 U4.32 U13.6 | length 928.8
  Top Layer w10: v1(1935,2671) 1938.5,2674.5 1938.5,2775.98 1985.52,2823 v1(1989,2823)
  Bottom Layer w10: U4.32 1658.56,2405.47 1725,2471.92 1725,2598.77 1807.23,2681 1925,2681 v1(1935,2671) ; v1(1989,2823) 2015.5,2823 R15.2 2074.5,2912.38 2090,2927.88 U13.6@2090,2950.79
DEBUG_RTS: R14.2 U4.33 U13.2 | length 1043.9
  Top Layer w10: v1(1955,2639) 2082,2766 v1(2130,2766)
  Bottom Layer w10: U4.33 1560.32,2387.57 1585.46,2387.57 1586.36,2388.47 1665.6,2388.47 1742,2464.88 1742,2591.73 1813.27,2663 1905.52,2663 1924.02,2644.5 1949.5,2644.5 v1(1955,2639) ; v1(2130,2766) 2130,2785.5 2189,2844.5 U13.2@2189,2963.01
DEBUG_RXI: R12.2 U4.31 U13.1 | length 1140.9
  Bottom Layer w10: U4.31 1562.1,2426.94 1655.98,2426.94 1708,2478.96 1708,2605.81 1800.19,2698 2193.48,2698 2223.69,2728.21 2223.69,2802.18 R12.2 2213.5,2902 U13.1
DEBUG_TXO: R13.2 U4.30 U13.4 | length 945.9
  Bottom Layer w10: U4.30 1562.1,2446.62 1651.62,2446.62 1691,2486 1691,2612.85 1794.15,2716 2023.5,2716 R13.2 2138.5,2831 U13.4
GND: BAT1.- C1.2 C2.2 C3.2 C4.1 C5.2 C6.2 C7.2 C8.2 C9.2 C10.2 C11.2 C12.2 C13.2 C15.2 C16.2 C17.2 C18.2 C19.2 C20.1 C21.2 C22.2 C23.2 C24.1 C25.2 C26.2 C27.2 C28.2 C29.2 C30.2 C31.1 C33.1 C34.2 C35.2 CMP1.- D2.A D4.C FAN.1 HALL.3 KILL.2 LED8.C LED9.C MOT1.- N1.2 P1.6 P8.5 P8.SHD R2.2 R5.2 R9.2 R20.2 R21.2 R28.2 R31.2 R32.2 S1.A SP1.- U1.3 U2.7 U3.2 U3.5 U4.8 U4.23 U4.35 U4.47 U5.2 U6.2 U7.4 U8.4 U9.9 U9.15 U9.16 U10.2 U11.9 U11.15 U11.16 U13.5 U13.13 U14.1 | length 8195.4
  Top Layer w10: U2.7 1117.09,2279.43 1093.28,2303.24 1093.28,2339.3 1109.98,2356 v1(1120,2356) ; C7.2 C7.2@1340,2276.5 ; C20.1@1340,2317.91 C20.1 ; v1(1433.49,813.49) v1@1436,816 ; v1(1435,378) v1@1444.32,368.68 ; C26.2 C26.2@1567.5,488.5
  Top Layer w15: U7.4 61,2114.09 C24.1 78.91,2188.09 v1@77,2190 ; v1@69.68,1265.68 LED8.C ; v1(78,2191) R20.2@78,2229.5 ; v1(988,2674) 1014.5,2647.5 R31.2 C2.2 ; v1(1302,2207) 1302,2238.5 C7.2 ; R5.2 v1@1302.5,2206.5 ; C7.2@1340,2276.5 C20.1@1340,2317.91 ; U8.4 v1(1433.49,813.49) ; v1(1435,378) C31.1@1435,433.91 ; LED9.C v1@1444.32,368.68 ; C8.2 1486,2630.5 v1@1486,2647 ; C6.2 1584.5,2345 v1@1623,2345 ; C26.2@1567.5,488.5 v1(1614,442) ; R21.2 1571.5,796.5 1618,843 C28.2 ; C29.2 1788.41,1233 1875.72,1145.69 1916.28,1145.69 1991,1220.41 v1(1991,1228) ; v1(1891,3204) 1957.65,3137.35 P8.SHD@1957.65,3093.43 ; v1(2010,2980) 2017.12,2987.12 2052.13,2987.12 P8.5 ; v1(2043,2807) 2048,2812 2048,2863.5 C12.2 ; C5.2 S1.A@2311.58,2719.91 ; P8.SHD@2288.35,3093.43 2288.35,3017.65 v1(2306,3000) ; S1.A@2311.58,2383.5 v1(2355.5,2383.5) v1@2359,2380
  Top Layer w20: C30.2 1694,1949.79 D4.C
  Top Layer w50: BAT1.- 1868.06,257.35 D2.A
  Bottom Layer w7: v1@135,2980 v1(135.52,2979.48) ; C17.2 C17.2@593,2608.11 ; v1(709,2661) R2.2 ; v1@936.43,1577.57 v1(938,1576) ; C3.2@1024.5,2674 C3.2 ; v1(1103,2453) 1105,2455 U10.2 U10.2@1116.69,2491.31 ; v1(1120,2356) v1@1120.5,2355.5 ; v1@1621.58,2346.42 v1@1623,2345 ; v1(2010,2980) 2008,2982 2008,3082.36 2022.64,3097 2043.36,3097 2113.5,3026.86 U13.5 ; U13.13 2138.5,3105.5 2161.32,3082.68 2227.74,3082.68 2247.89,3102.83 2247.89,3123.89 v1(2332,3208)
  Bottom Layer w10: v1@77.5,2191.5 v1(78,2191) v1@78.5,2190.5 ; U5.2@500.5,2567.5 U5.2 U5.2@537.5,2604.5 ; U9.16 753.5,464 ; U9.15 U9.15@714.63,507.5 ; U14.1@768.87,2545.06 U14.1@769.43,2544.5 ; C19.2@823,2605 C19.2 ; C23.2@826,2664 C23.2 ; v1(838.5,507.5) v1@841,505 ; v1(1374,3107) v1@1374.49,3107.49 ; R9.2@1508,2848.5 U3.2 ; C4.1 1666.5,3178.5 v1@1669,3176 ; v1(1891,3204) 1903,3192 C15.2 C15.2@1940.14,3192 ; v1@2302.5,3003.5 v1(2306,3000) v1@2309.5,3003.5
  Bottom Layer w12: U9.9 819,814 v1(837,796) ; U9.15@714.63,507.5 C25.2@797,507.5 ; 753.5,464 C25.2@797,507.5 ; v1(838.5,507.5) C25.2@797,507.5 ; U1.3 904,1678 934.5,1708.5 C33.1 ; U10.2@1116.69,2491.31 1127.5,2480.5 1127.5,2475.61 1143.61,2459.5 1166.39,2459.5 1171.42,2464.53 U4.8 ; v1(1302,2207) 1304.42,2209.42 U4.47 ; v1@1374.49,3107.49 U3.5 ; U4.23 1481.58,2642.58 v1@1486,2647 ; U3.2 v1(1508,2985) ; R9.2@1515,2841.5 R28.2 ; U11.9 1566.13,844 v1(1617,844) ; U4.35 v1@1621.58,2346.42 ; C10.2 v1@2302.5,3003.5 ; v1@2309.5,3003.5 C11.2 C13.2
  Bottom Layer w15: C22.2 v1@77.5,2191.5 ; v1@78.5,2190.5 C21.2 ; HALL.3 v1(135.52,2979.48) ; C1.2 281,2698.51 281,2631.49 326.23,2586.26 KILL.2 ; C18.2 U5.2@500.5,2567.5 ; U5.2@537.5,2604.5 C17.2 ; N1.2@574.2,2754 v1(600,2754) ; U14.1@769.43,2544.5 C34.2 ; C19.2@823,2605 v1(795,2633) C23.2@826,2664 ; U1.3 v1@936.43,1577.57 ; v1(988,2674) C3.2@1024.5,2674 ; C3.2 R32.2 ; C16.2 1105,2531.5 U10.2 ; C9.2 v1@1120.5,2355.5 ; U11.15 U11.16 1564.13,442 v1(1614,442)
  Bottom Layer w30: U5.2 559.6,2545.4 768.52,2545.4 U14.1@768.87,2545.06
  Bottom Layer w200: MOT1.- CMP1.- BAT1.- SP1.-
  other v1: 69,1265 1631,2341 1489,2659 250,2809 40,2810 70,2810 100,2810 130,2810 160,2810 190,2810 220,2810 1669,3178
"HALL ON": HALL.2 U4.16 | length 1427.2
  Bottom Layer w12: HALL.2 214.26,2976.26 274,3036 972.07,3036 1022.57,2985.5 1023.75,2985.5 1042.5,2966.75 1042.5,2965.57 1343.1,2664.97 1343.1,2603.01 U4.16
I2C_SCL: R7.2 U2.5 U4.42 | length 613.9
  Top Layer w10: v1(1002,2163) 1023.06,2163 U2.5
  Bottom Layer w7: R7.2 1021.5,2199.5 1053.01,2168 1382.15,2168 1406,2191.85 1406,2233 1403,2236 1403,2267.52 U4.42
  Bottom Layer w10: v1(1002,2163) R7.2
I2C_SDA: R8.2 U2.6 U4.43 | length 490.8
  Top Layer w10: U2.6 1117.09,2220.38 1157,2260.29 v1(1157,2263)
  Bottom Layer w7: v1(1157,2263) 1157,2221 1196,2182 1376.36,2182 1392,2197.64 1392,2227.2 1383.16,2236.04 U4.43
  Bottom Layer w10: R8.2 1156,2262 v1(1157,2263)
KILL: C1.1 KILL.1 R24.2 U4.14 | length 1620.7
  Bottom Layer w10: R24.2@310,2852.5 R24.2 ; KILL.1 KILL.1@359,2691
  Bottom Layer w12: R24.2@310,2852.5 C1.1 344,2756.5 KILL.1@344,2676 ; KILL.1@359,2691 359,2855 521,3017 964.2,3017 1014.7,2966.5 1015.88,2966.5 1023.5,2958.88 1023.5,2957.7 1304.42,2676.78 U4.14
LED1: PWR.C U4.27 | length 105.6
  Top Layer w10: PWR.C@1556.68,2534 PWR.C
  Top Layer w15: v1(1515,2534) PWR.C@1556.68,2534
  Bottom Layer w10: v1(1515,2534) 1515,2525.87 1536.97,2503.9 U4.27
LED2: DBG.C U4.28 | length 102.8
  Top Layer w15: v1(1514,2458) DBG.C
  Bottom Layer w10: v1(1514,2458) 1514,2461.24 1536.97,2484.21 U4.28
MOT_EN: R20.1 R22.1 U4.39 U7.2 | length 2460.7
  Top Layer w10: R20.1@151.5,2240 155.5,2236 R20.1@155.5,2227
  Top Layer w12: R20.1@155.5,2227 v1(240,2227)
  Top Layer w15: R22.1 83.5,1731.5 25,1790 25,1893 59,1927 133,1927 161,1955 U7.2 161,2078 151.5,2087.5 R20.1
  Bottom Layer w12: v1(240,2227) 445,2227 504,2286 828,2286 981,2133 1401,2133 1461.9,2193.9 U4.39
MOT_I: U4.12 U9.12 | length 2522
  Top Layer w7: v1(1277,2521) v1@1287,2521
  Top Layer w12: v1(708,857) 708,1075 959,1326 959,1553 1112,1706 1324,1706 1462.5,1844.5 1462.5,2345.5 v1@1287,2521
  Bottom Layer w10: v1(1277,2521) v1@1277,2526
  Bottom Layer w12: v1(708,857) 689.81,838.81 664.39,838.81 649.86,824.28 649.86,689.86 675.72,664 U9.12 ; U4.12 1259.73,2543.27 v1@1277,2526
MOTORS: MOT1.+ U9.1 U9.2 U9.3 U9.4 | length 198
  Bottom Layer w200: MOT1.+ 354,537
MT_PW: Q1.S Q2.S U7.3 U9.5 U9.6 U9.7 U9.8 | length 1635.2
  Top Layer w20: v1(110,1957) 111,1958 U7.3
  Bottom Layer w20: v1(110,1957) 213,1854 215,1854
  Bottom Layer w90: 216.28,1855.28 Q2.S ; 254,1107.28 Q1.S
  Bottom Layer w100: 215,1854 216.28,1855.28
  Bottom Layer w200: 211,1854 211,886 352.5,744.5
NetBUZZ_2: BUZZ.2 N1.3 R1.2 | length 211.7
  Bottom Layer w7: R1.2@714.1,2833.4 R1.2
  Bottom Layer w15: BUZZ.2 555.26,2909.23 607,2857.49 N1.3 R1.2@714.1,2833.4
NetC10_1: C10.1 FB1.2 P8.1 | length 162.1
  Top Layer w10: P8.1 2222.99,2958 FB1.2 2227.5,2944.5 v1(2267,2905)
  Bottom Layer w10: C10.1@2267,2939.5 C10.1
  Bottom Layer w12: v1(2267,2905) C10.1@2267,2939.5
NetC11_1: C11.1 P8.2 R16.1 | length 324
  Top Layer w10: P8.2 2154.5,2951.5 2171,2935 R16.1 2212.03,2922.5 2256.02,2878.5 2277.98,2878.5 2296.48,2897 2336,2897 v1@2344,2905
  Bottom Layer w12: v1(2344,2898) C11.1
NetC12_1: C12.1 P8.3 R19.1 | length 134.4
  Top Layer w10: R19.1 R19.1@2123,2934.5
  Top Layer w12: C12.1 R19.1 ; R19.1@2123,2934.5 P8.3
NetC13_1: C13.1 FB1.1 U13.12 | length 480
  Top Layer w10: v1(2113,3092) 2170.48,3092 2207.83,3054.64 2207.83,3032.96 2234.17,3006.62 2241.87,3006.62 FB1.1 2324,2924.5 2354.98,2924.5 2378.48,2901 v1(2400,2901)
  Bottom Layer w10: v1(2113,3092) 2113,3152.99 U13.12
  Bottom Layer w12: v1(2400,2901) C13.1
NetC14_1: C14.1 U13.16 | length 480.2
  Bottom Layer w10: C14.1 1864.5,3139 1864.5,3214.98 1880.02,3230.5 2060.5,3230.5 2082.2,3208.8 2196.32,3208.8 2214,3191.12 U13.16@2214,3166.21
NetC27_1: C27.1 U9.11 | length 96.5
  Bottom Layer w12: U9.11 778.5,714 C27.1@797,732.5
NetC28_1: C28.1 U11.11 | length 127.2
  Top Layer w15: v1(1618,698) C28.1
  Bottom Layer w12: U11.11 1558.13,698 v1(1618,698)
NetC32_1: C32.1 R25.2 U12.1 | length 104.8
  Top Layer w10: R25.2@1731.4,1456.9 R25.2
  Top Layer w15: C32.1 R25.2 ; U12.1 R25.2@1731.4,1456.9
NetC32_2: C32.2 D3.A D4.A U12.2 U12.3 | length 857.9
  Top Layer w10: C32.2@1619.5,1438.35 C32.2
  Top Layer w15: C32.2@1619.5,1438.35 U12.3 U12.2
  Top Layer w20: D3.A 1615.82,1076.44 1615.82,1453.31 C32.2 1694,1531.5 D4.A
NetDBG_A: DBG.A R4.2 | length 78.5
  Top Layer w15: R4.2 1642.32,2411.82 DBG.A
NetLED8_A: LED8.A R22.2 | length 89.2
  Top Layer w10: R22.2 R22.2@154.32,1394.17
  Top Layer w15: LED8.A R22.2@154.32,1394.17
NetLED9_A: LED9.A R23.2 | length 133.8
  Top Layer w10: LED9.A@1359,315.68 LED9.A
  Top Layer w15: LED9.A@1359,315.68 R23.2
NetP3_1: P3.1 SBUS1.1 SBUS2.1 U3.7 | length 970
  Top Layer w10: v1(1505,3040) 1568,2977 v1(1694,2977) ; SBUS1.1 1888.4,2917 1930,2875.4 1930,2840.6 1888,2798.6 P3.1@1888,2758
  Bottom Layer w10: SBUS2.1 1343,2918.68 1481.81,3057.49 1481.81,3056.81 U3.7@1514,3089 ; v1(1505,3040) U3.7@1505,3104.49 ; SBUS1.1@1694,2920 SBUS1.1
  Bottom Layer w12: SBUS1.1@1694,2920 v1(1694,2977)
NetP3_2: P3.2 R11.1 | length 130.3
  Top Layer w10: R11.1 1836.5,2806.5 P3.2@1888,2858
NetPWR_A: PWR.A R3.2 | length 73.1
  Top Layer w7: PWR.A PWR.A@1647.5,2540.17
  Top Layer w15: PWR.A@1647.5,2540.17 R3.2
NetQ1_G: Q1.G Q2.G U7.5 | length 1352.5
  Top Layer w20: Q1.G 358,1503.39 61,1800.39 U7.5 61,1889 71.82,1899.82 240.7,1899.82 336.69,1803.83 379.31,1803.83 409.45,1833.96 409.45,2008.55 Q2.G
NetQ3_G: Q3.G U8.5 | length 551.9
  Top Layer w20: U8.5 1244.51,1214.51 Q3.G
NetQ4_G: Q4.G Q5.G U12.5 | length 1043.1
  Top Layer w20: U12.5 1694,1321.93 1719.47,1347.39 1845.61,1347.39 Q4.G 1957,1358 1957,1982 Q5.G
NetR10_2: R10.2 RXI.A | length 100.2
  Top Layer w10: v1(1688,2746) v1@1694.32,2752.32
  Top Layer w15: v1@1694.32,2752.32 RXI.A
  Bottom Layer w10: R10.2 1686.5,2747.5 v1(1688,2746)
NetR11_2: R11.2 SBUS1.2 SBUS2.2 U3.6 | length 949.1
  Top Layer w10: SBUS1.2 1618.26,2913.77 1664.53,2867.5 1681.1,2867.5 1723.06,2825.55 1723.06,2805.12 1779,2749.17 R11.2
  Bottom Layer w10: SBUS2.2 1264.26,2920.23 1310.53,2966.5 1366.78,2966.5 1458,3057.72 U3.6 1458,3151 1469.8,3162.8 1517.86,3162.8 1531.81,3148.85 1531.81,3033.68 1618.26,2947.23 SBUS1.2
NetR16_2: R16.2 U13.9 | length 614.6
  Top Layer w10: v1(1971,2980) 1985.5,2965.5 1985.5,2913.02 2016,2882.52 2016,2833.48 2015.5,2832.98 2015.5,2796.02 2039.02,2772.5 2060.98,2772.5 2076.5,2788.02 2076.5,2803.5 2107.3,2834.3 2137.15,2834.3 2162.36,2859.5 R16.2
  Bottom Layer w10: v1(1971,2980) 1971,3085.99 U13.9
NetR17_2: R17.2 TX.A | length 57.2
  Top Layer w12: R17.2 TX.A
NetR18_2: R18.2 RX.A | length 57.2
  Top Layer w15: R18.2 RX.A
NetR19_2: R19.2 U13.8 | length 89
  Top Layer w10: v1(2012,2924) R19.2
  Bottom Layer w10: v1(2012,2924) 2038.5,2950.5 U13.8
NetR27_2: R27.2 TXO.A | length 117
  Top Layer w10: v1@1404.32,2841.32 v1(1410,2847)
  Top Layer w15: TXO.A v1@1404.32,2841.32
  Bottom Layer w10: R27.2 1391.5,2828.5 v1(1410,2847)
NetR28_1: R28.1 TE.C | length 91.2
  Top Layer w15: v1(1557,2737) TE.C@1557,2786.32
  Bottom Layer w10: R28.1 1556,2738 v1(1557,2737)
NetRX_C: RX.C U13.7 | length 522
  Top Layer w10: v1(2033,3072) 2040.04,3072 2088.04,3120 2173.94,3120 2234.17,3180.23 2342.54,3180.23 2359.44,3163.32 RX.C
  Bottom Layer w10: v1(2033,3072) 2033,3051 2063.5,3020.5 U13.7
NetTX_C: TX.C U13.14 | length 692.7
  Top Layer w10: TX.C 1864.5,3164.82 1864.5,3214.98 1880.02,3230.5 1901.98,3230.5 1925.48,3207 v1(2283,3207)
  Bottom Layer w10: U13.14@2163.43,3115.43 2163.43,3104.57 2169.82,3098.18 2221.32,3098.18 2232.39,3109.25 2232.39,3156.39 v1(2283,3207)
NRST: C5.1 C14.2 P1.5 R6.2 R29.2 S1.B U4.7 | length 2235.5
  Top Layer w10: v1(1738,2702) 1842.47,2597.53 1842.47,2557.8 1866.8,2533.47 1906.53,2533.47 1965,2475 P1.5 ; S1.B@2131.91,2381 S1.B@2134.42,2383.5 ; S1.B@2134.42,2696.5 S1.B@2134.42,2723.91
  Top Layer w12: v1(2086,2381) S1.B@2131.91,2381
  Top Layer w15: S1.B@2134.42,2723.91 C5.1
  Bottom Layer w7: P1.5@1968,2475 P1.5
  Bottom Layer w10: v1(1738,2702) 1840,2804 1913,2804 1930,2821 1930,3076.5 R29.2 C14.2 ; v1@2078,2381 v1(2086,2381) ; R6.2@2134.5,2381 R6.2
  Bottom Layer w12: U4.7 1374.16,2444.84 1532,2287 1679,2287 1839,2447 1839,2498 1864,2523 1920,2523 P1.5@1968,2475 ; P1.5 v1@2078,2381 ; v1(2086,2381) R6.2@2134.5,2381
RAIL+: BAT1.+ C17.1 C21.1 C24.2 C30.1 C31.2 C35.1 D2.C Q1.D Q2.D Q3.D Q4.D Q5.D R25.1 R26.1 U5.1 U6.1 U7.1 U8.1 U12.6 | length 8354.9
  Top Layer w10: C24.2 C24.2@211,2114.09 ; v1(597,2707) 663.52,2707 742.02,2785.5 847.54,2785.5 926.04,2707 1111.52,2707 1133.02,2685.5 1182,2685.5 R26.1 ; U8.1 U8.1@1435,616.49
  Top Layer w12: U7.1 C24.2@211,2114.09
  Top Layer w20: U7.1 287.15,2028.49 ; U8.1@1435,616.49 1435,548.09 1490.16,548.09 1543.58,601.5 1689.5,601.5 BAT1.+ ; U12.6 1781.9,1308.74 Q4.D ; R25.1 v1(1864,1457) v1@1867,1454
  Top Layer w30: Q2.D 287.15,2028.49 292,2033.34 292,2517.49 273,2536.49 273,2701.11 286.39,2714.5 472.5,2714.5 501,2686 U5.1
  Top Layer w50: BAT1.+ 1864.35,426.65 D2.C
  Bottom Layer w10: C21.1 C21.1@116.49,2253.5 ; U5.1 U5.1@537.5,2667.5 ; C17.1 597,2671.5 v1(597,2707)
  Bottom Layer w15: C21.1@116.49,2253.5 U6.1 ; U5.1@537.5,2667.5 C17.1
  Bottom Layer w20: 1744,1458 1745,1457 v1(1864,1457)
  Bottom Layer w30: U6.1 200,2337.01 200,2115.64 Q2.D
  Bottom Layer w70: Q3.D 1216.64,1399.36
  Bottom Layer w80: Q1.D 488.36,1209.64 507,1191 ; 470.64,1957.64 498,1985 ; 1180,1436 1216.64,1399.36
  Bottom Layer w90: Q2.D 470.64,1957.64
  Bottom Layer w100: 1203,1513 C35.1@1203,1622.36 ; 1230,1374.79 1230,1430.68 ; 1754,1197 1756.36,1194.64 Q4.D ; 1754,1934 1760.64,1940.64 Q5.D
  Bottom Layer w200: 498,1985 723.45,1759.55 723.45,1407.45 507,1191 ; 723.45,1436 1180,1436 ; 1054,1436 1180.18,1435.82 1236.64,1435.73 1738,1435 ; 1181,1435 1227,1435 ; BAT1.+@1743,537 1743,1194.64 ; 1744,1197 1744,1458 1744,1934
"RAIL+ VLTG": C2.1 R26.2 R31.1 U4.11 | length 227.2
  Top Layer w10: v1@1174.5,2549 v1(1175,2549) ; R26.2@1209.5,2583.5 R26.2
  Top Layer w15: R31.1 C2.1 v1@1174.5,2549 ; v1(1175,2549) R26.2@1209.5,2583.5
  Bottom Layer w12: v1(1175,2549) 1200.42,2523.58 U4.11
SHORE+: C29.1 D3.C Q4.S Q5.S R30.1 SP1.+ U12.4 | length 3698.8
  Top Layer w7: Q5.S Q5.S@1896,1850.74
  Top Layer w12: v1(1144,2712) 1250,2712 1390,2572 1390,2530 1525,2395 1525,2280 1556,2249 1604,2249 1846.32,2006.68 1846.32,1900.42 Q5.S@1896,1850.74
  Top Layer w20: U12.4 1656.6,1237.09 C29.1 1652.5,1197.24 D3.C 1755.74,1094 1894.28,1094 Q4.S
  Bottom Layer w7: v1(1144,2712) v1@1145,2711
  Bottom Layer w12: R30.1 v1@1145,2711
  Bottom Layer w80: 2018.89,1838.28 2037.31,1856.69 ; 2031.58,1092.28 2050,1110.69
  Bottom Layer w90: Q4.S 2031.58,1092.28 ; Q5.S 2018.89,1838.28
  Bottom Layer w200: 2037.31,1856.69 2145.88,1856.69 2249,1753.58 2243.16,1747.74 SP1.+@2243.16,542.16 ; 2050,1110.69 2233,1110.69 ; SP1.+ SP1.+@2243.16,542.16 ; SP1.+@2243.16,525 SP1.+@2243.16,542.16
"SHORE+ VLTG": C3.1 R30.2 R32.1 U4.10 | length 284.7
  Bottom Layer w12: R30.2@1141,2612.5 1141,2544.11 1163.61,2521.5 1168.39,2521.5 1185.99,2503.9 U4.10
  Bottom Layer w15: C3.1 R32.1 R30.2@1141,2612.5
SUBBUS_RXI: RXI.C U3.1 U4.22 | length 485.1
  Top Layer w15: RXI.C v1@1609.68,2845.32
  Bottom Layer w10: U4.22 1461.9,2669.37 1478.02,2685.5 1542.98,2685.5 1587.69,2730.21 1587.69,2760.17 1590.83,2763.31 1590.83,2819.66 1606,2834.82 v1(1606,2849) 1558,2897 U3.1
SUBBUS_TE: R9.1 TE.A U3.3 U4.25 | length 474.9
  Top Layer w15: TE.A@1456.68,2795 v1@1456.68,2847.32 ; v1@1508.5,2735.5 v1(1571,2673)
  Bottom Layer w10: U3.3@1457,2914.51 v1(1457,2849) 1457,2827.5 R9.1 ; U4.25 1560.32,2662.32 v1(1571,2673)
  Bottom Layer w15: R9.1 1509,2775.5 v1(1509,2736)
SUBBUS_TXO: TXO.C U3.4 U4.21 | length 630.9
  Top Layer w15: TXO.C v1@1319.68,2849.32
  Bottom Layer w10: U3.4 1408,2886 1372,2850 v1(1319,2850) 1289.5,2820.5 1266.02,2820.5 1250.5,2804.98 1250.5,2783.02 1266.02,2767.5 1267.21,2767.5 1274.71,2760 1393,2760 1442.21,2710.79 U4.21
SWCLK: P1.3 U4.37 | length 489.4
  Bottom Layer w7: U4.37 1507.95,2261 ; P1.3@1884,2449 P1.3
  Bottom Layer w12: 1507.95,2261 1696,2261 P1.3@1884,2449
SWDIO: P1.1 U4.34 | length 280
  Bottom Layer w7: P1.1@1784,2454 P1.1
  Bottom Layer w12: U4.34@1561.1,2366.88 1585.87,2366.88 1587.49,2368.5 1698.5,2368.5 P1.1@1784,2454
TEMP_RAIL+: U1.2 U4.15 | length 1454.2
  Top Layer w12: v1(1114,1648.43) 1131.43,1648.43 1163,1680 1333.8,1680 1481.5,1827.7 1481.5,2374.5 1333,2523 v1(1333,2556)
  Bottom Layer w7: v1(1333,2556) v1@1333,2565
  Bottom Layer w12: U1.2 v1(1114,1648.43) ; U4.15 1324.1,2573.9 v1@1333,2565
U3V3: C15.1 R17.1 R18.1 U13.3 U13.10 U13.11 | length 1192.5
  Top Layer w10: R17.1 1911.12,3006.62 2011.83,3006.62 2018.86,3013.65 2018.86,3020.03 2056.82,3058 2167,3058 v1@2162,3053 ; v1@2162,3046.37 v1(2162,3056) ; R18.1 R18.1@2388.5,2953
  Top Layer w15: R18.1@2388.5,2953 v1(2441,2953)
  Bottom Layer w10: C15.1 2013.88,3192 2030.68,3208.8 2046.32,3208.8 2063.5,3191.62 U13.10 U13.11 2088.5,3104.98 2086.5,3102.98 2086.5,3081.02 2109.52,3058 v1@2167,3058 ; v1@2162,3053 v1@2167,3058 ; U13.3 2163.5,3054.5 v1@2167,3058 ; v1(2441,2953) 2440,2953 2440,3018.85 2400.85,3058 v1@2167,3058
pads on no net: P1.4 P8.4 Q1.0 Q2.0 Q3.0 Q4.0 Q5.0 U2.1 U2.4 U4.1 U4.2 U4.3 U4.4 U4.6 U4.17 U4.18 U4.19 U4.20 U4.26 U4.29 U4.38 U4.41 U4.45 U4.46 U7.6 U7.7 U7.8 U8.6 U8.7 U8.8 U9.10 U9.13 U11.10 U11.13 U13.15

## Polygon pours and split planes (outlines as drawn)
GND on Bottom Layer "16.8 computer dna" (solid, pour order 6): 34,2770 34,2825 262,2825 262,2770
3V3 on Bottom Layer "16.8 computer dna" (solid, pour order 3): 785,2450 695,2450 690,2450 650,2410 650,2365 849,2365 850,2364 850,2410
3V3 on Internal Plane 1 (split plane): 2713.52,2963.27 2713.09,2962.91 2713.08,2962.92 2713.57,2963.32
3V3 on Internal Plane 1 (split plane): 2713.98,287.64 2714.03,287.59 2713.54,287.99 2713.54,288
3V3 on Internal Plane 1 (split plane): -310.08,2961.92 -310.09,2961.91 -310.52,2962.27 -310.57,2962.32
3V3 on Internal Plane 1 (split plane): 268 vertices, not listed, extent -365,15.01 2760.44,3235.98
GND on Internal Plane 2 (split plane): 2713.52,2963.27 2713.09,2962.91 2713.08,2962.92 2713.57,2963.32
GND on Internal Plane 2 (split plane): 2713.98,287.64 2714.03,287.59 2713.54,287.99 2713.54,288
GND on Internal Plane 2 (split plane): -310.08,2961.92 -310.09,2961.91 -310.52,2962.27 -310.57,2962.32
GND on Internal Plane 2 (split plane): 268 vertices, not listed, extent -365,15.01 2760.44,3235.98

## Keep-outs
Keep-Out Layer:
  lines w9.84: -328.74,298.74 0.26,627.74 ; -320.74,2951.26 0.26,2630.26 ; -205,0 0,0 2390,0 2595,0 ; -204,3250 1,3250 2395,3250 2600,3251 ; -1,626.49 -1,2629 ; 2391.93,2620.44 2391.93,630.93 2724.2,298.66 ; 2393.74,2622.26 2723.74,2952.26
  lines w10: -328.74,298.74 ccw(c-205,175) -205,0 ; -320.74,2951.26 cw(c-197,3075) -197,3250 ; 2600,3251 cw(c2600,3076) 2723.74,2952.26 ; 2600.46,-0.09 ccw(c2600.46,174.91) 2724.2,298.66

## Silkscreen, mask and mechanical layers (free items; w line width, h text height)
Top Overlay:
  circle w10: c2577,3075 r150
  circle w10: c-180,3070 r150
  circle w10: c-187,180 r150
  circle w10: c2578,180 r150
  text "RESET" at 2389,2697 h29.53 r45
  text "MOTR PWR" at 14,1212 h29.53
  text "BATT" at 1698,286 h29.53 r90
  text "SHORE" at 2186,269 h29.53 r90
  text "MOTR OUT" at 57,231 h29.53 r90
  text "COMP PWR" at 1288,228 h29.53
  text "COMP OUT" at 907,225 h29.53 r90
Bottom Overlay:
  text "Merge Board" at 959,3172 h40
  text "Andrew Gray" at 959,3082 h40
  text "MIL Nov '13" at 959,2992 h40

## Text inside footprints (layer, text, board x,y; h text height)
P1: Top Overlay "1" at 1704,2455 h50; Top Overlay "2" at 1684,2555 h50; Top Overlay "5" at 2044,2455 h50; Top Overlay "6" at 2044,2555 h50